# Altium PCB Mechalino_Second_Layer.PcbDoc
Units mm, origin at the board's own origin, x right, y up, seen from the top; angles counter-clockwise.
Board outline 120 x 120 mm, 2 copper layers (Top Layer, Bottom Layer), stack 1.5 mm thick; 32 components, 32 nets, 120 pads, 10 vias.
Unrouted connection lines stored in the file: 13.
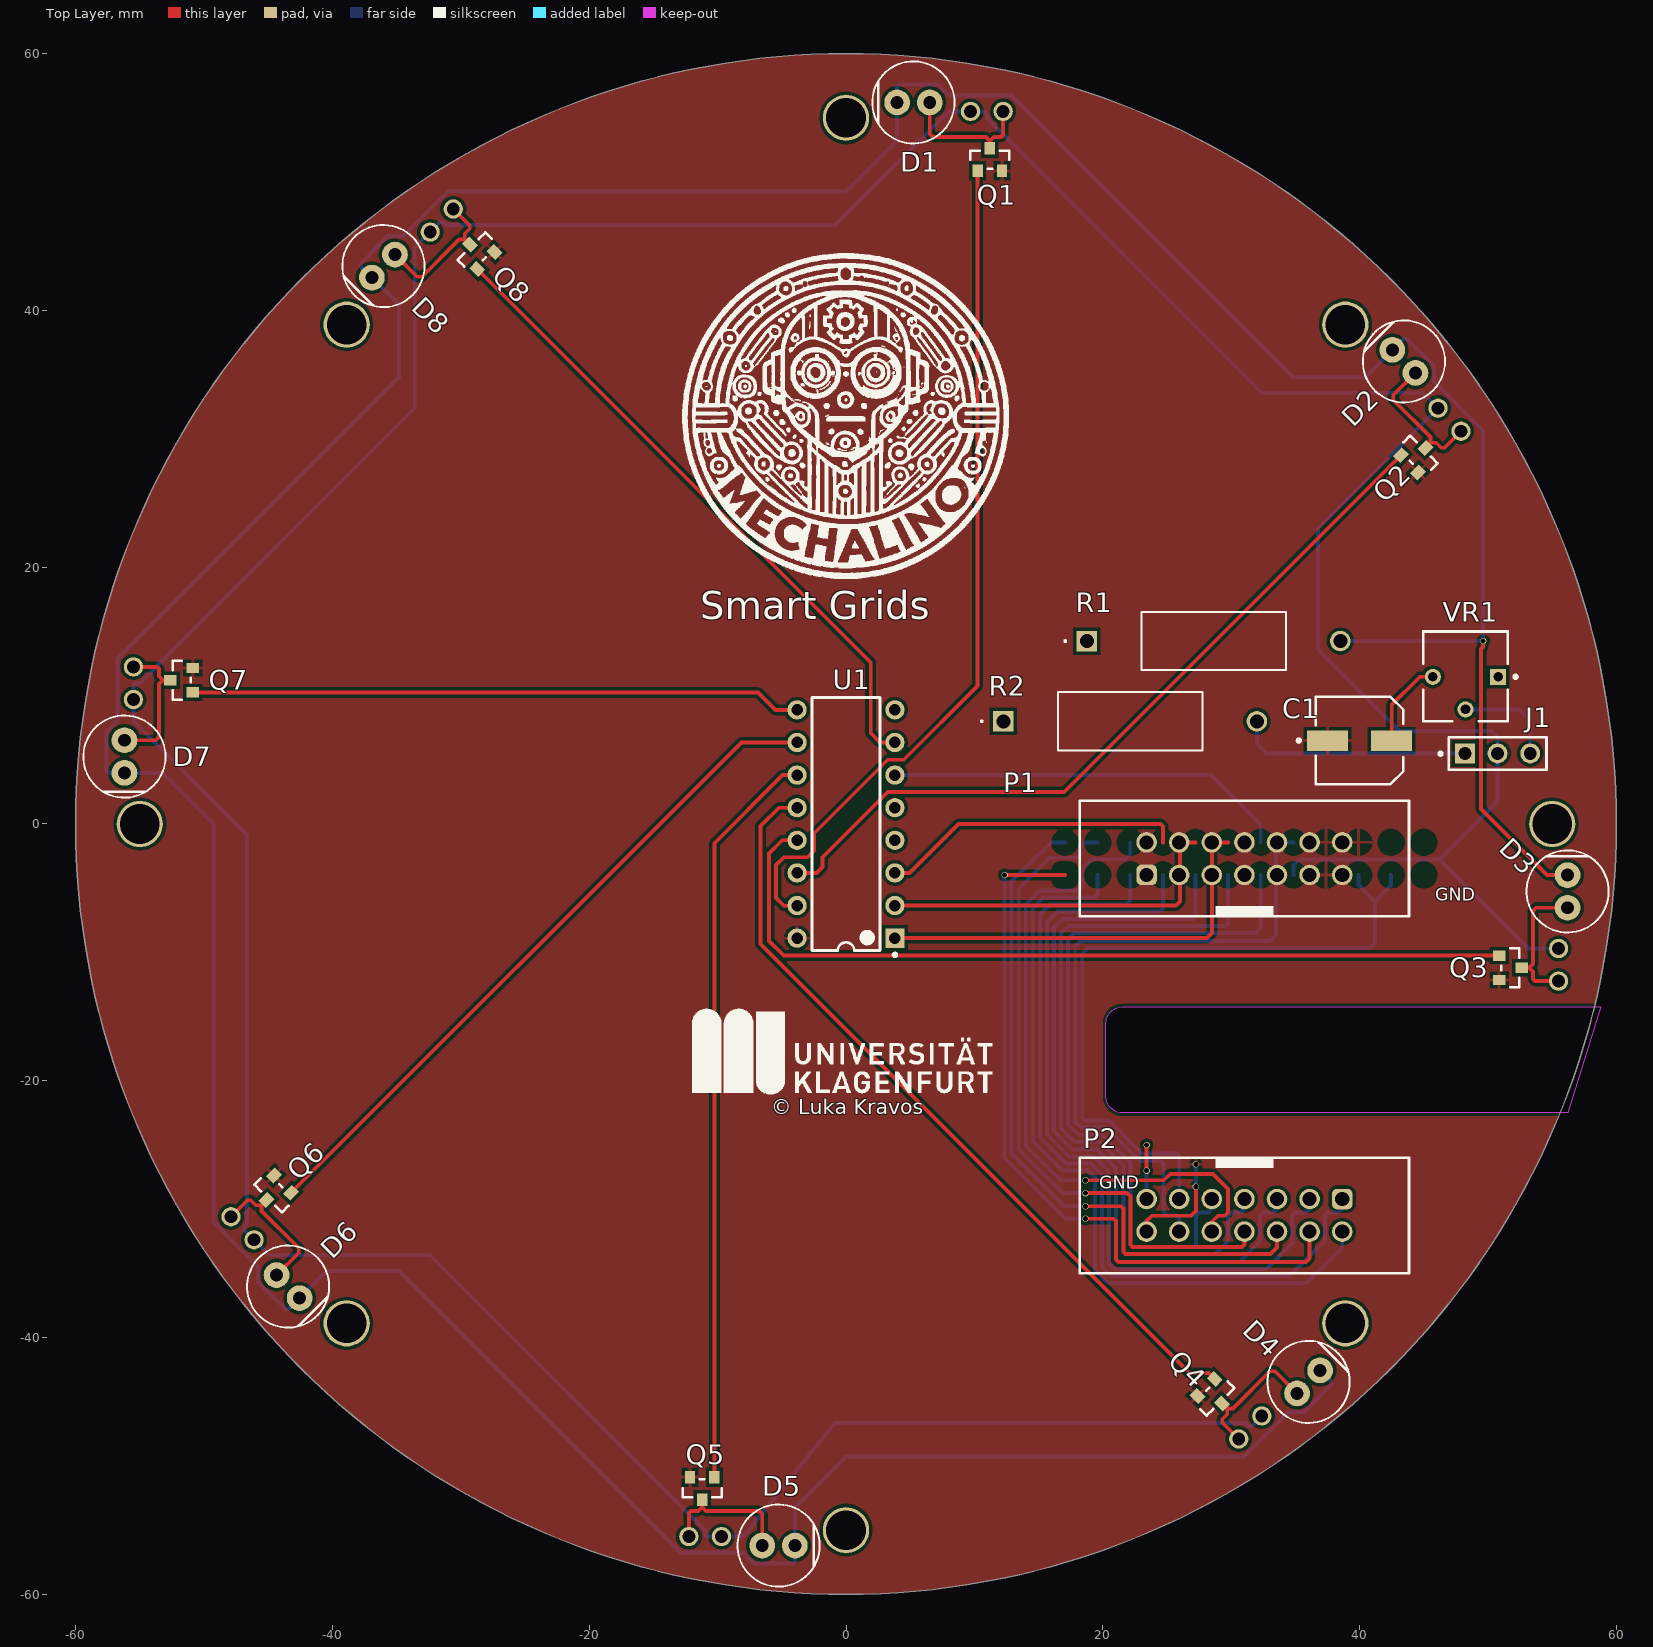
[diagram p0: Top Layer view]
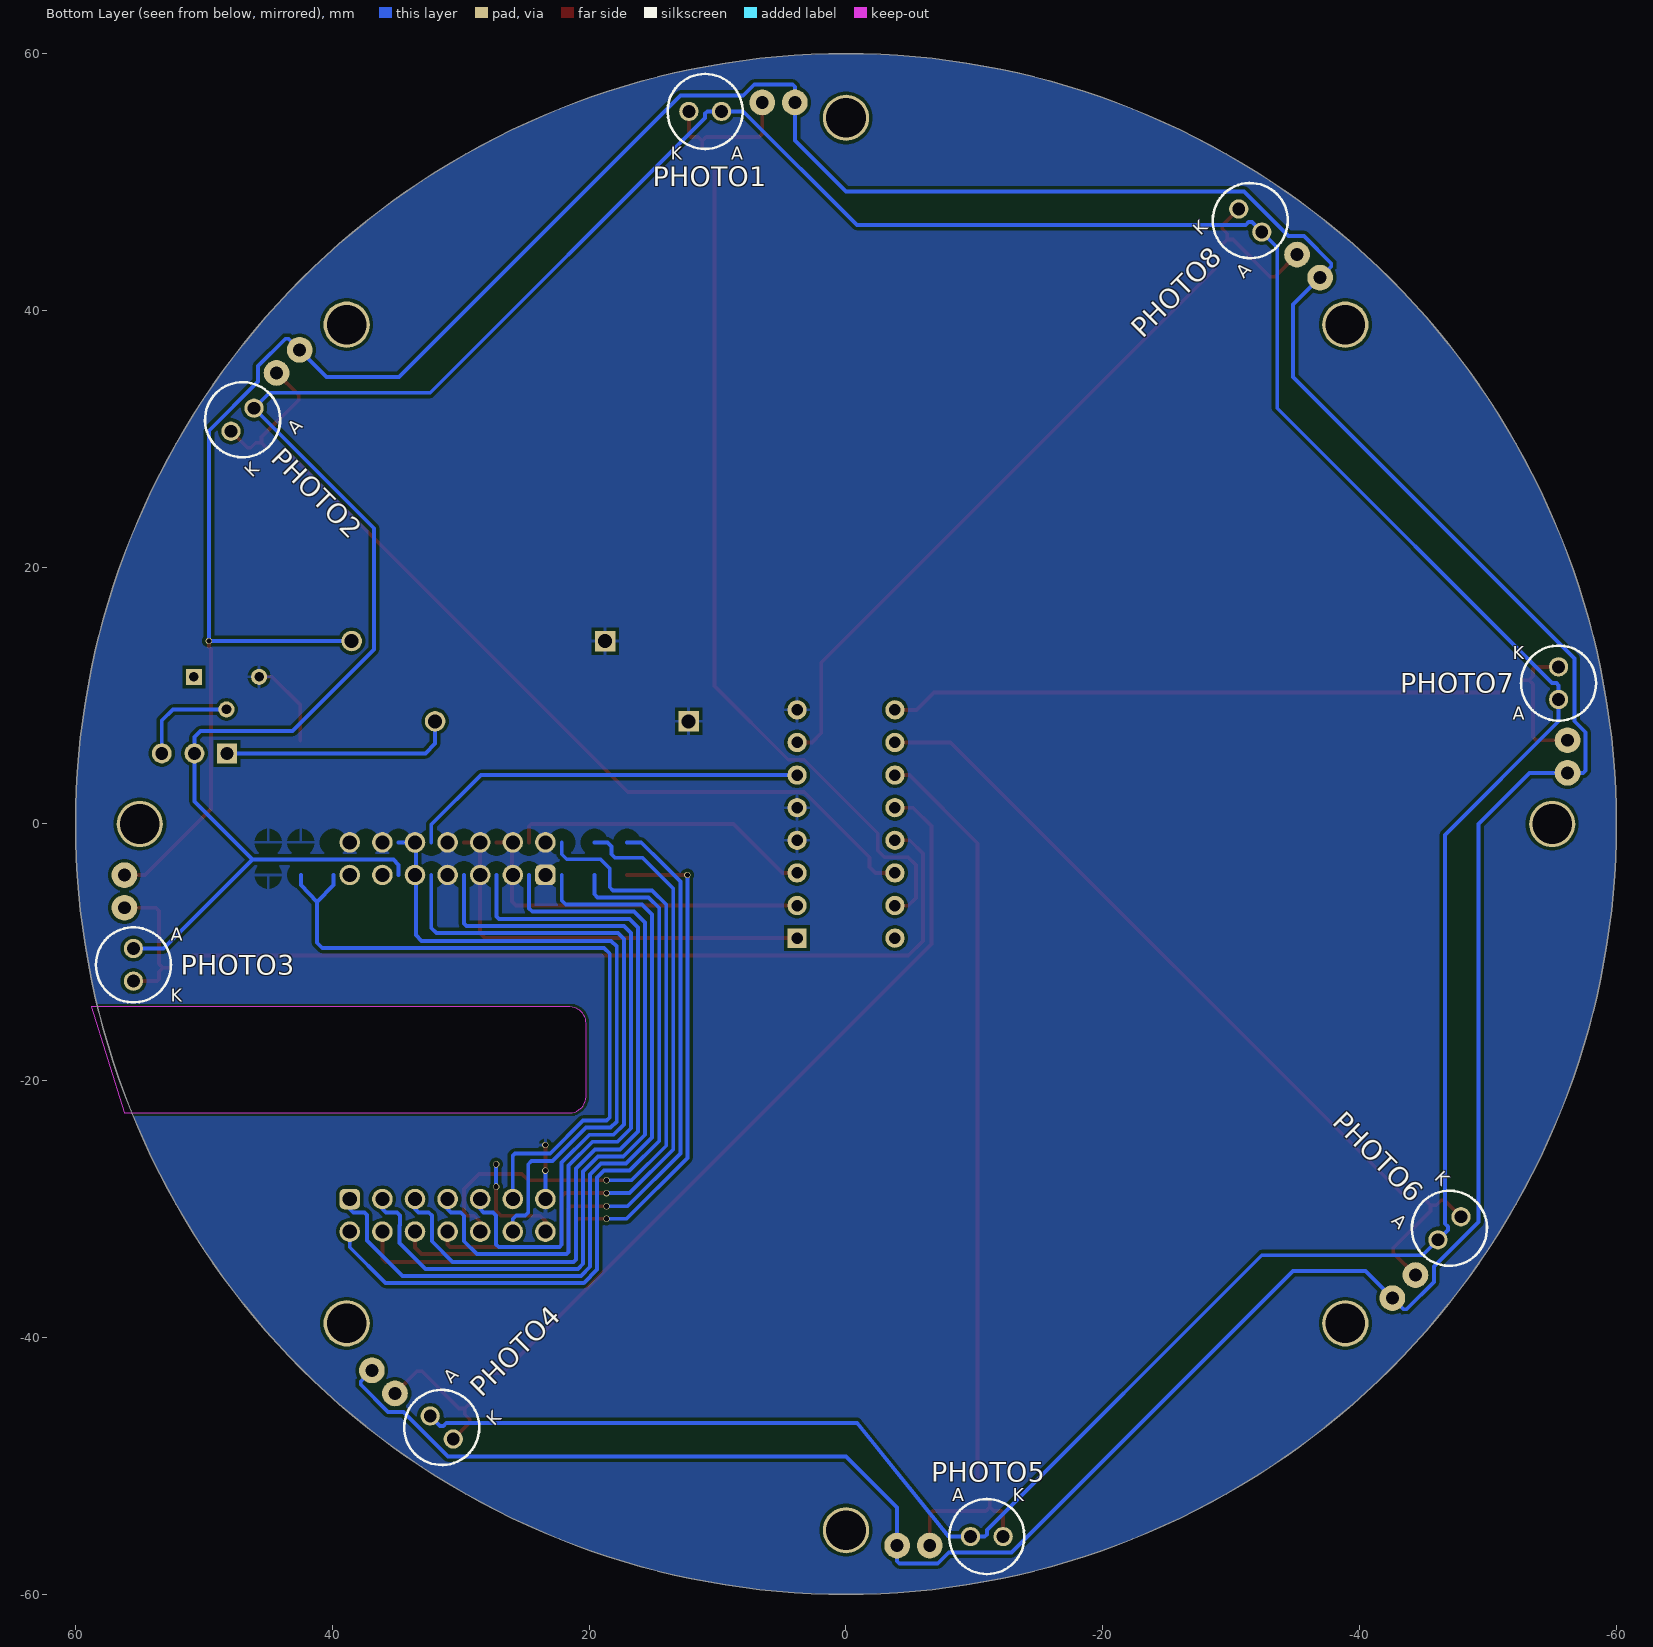
[diagram p1: Bottom Layer view, seen from below]
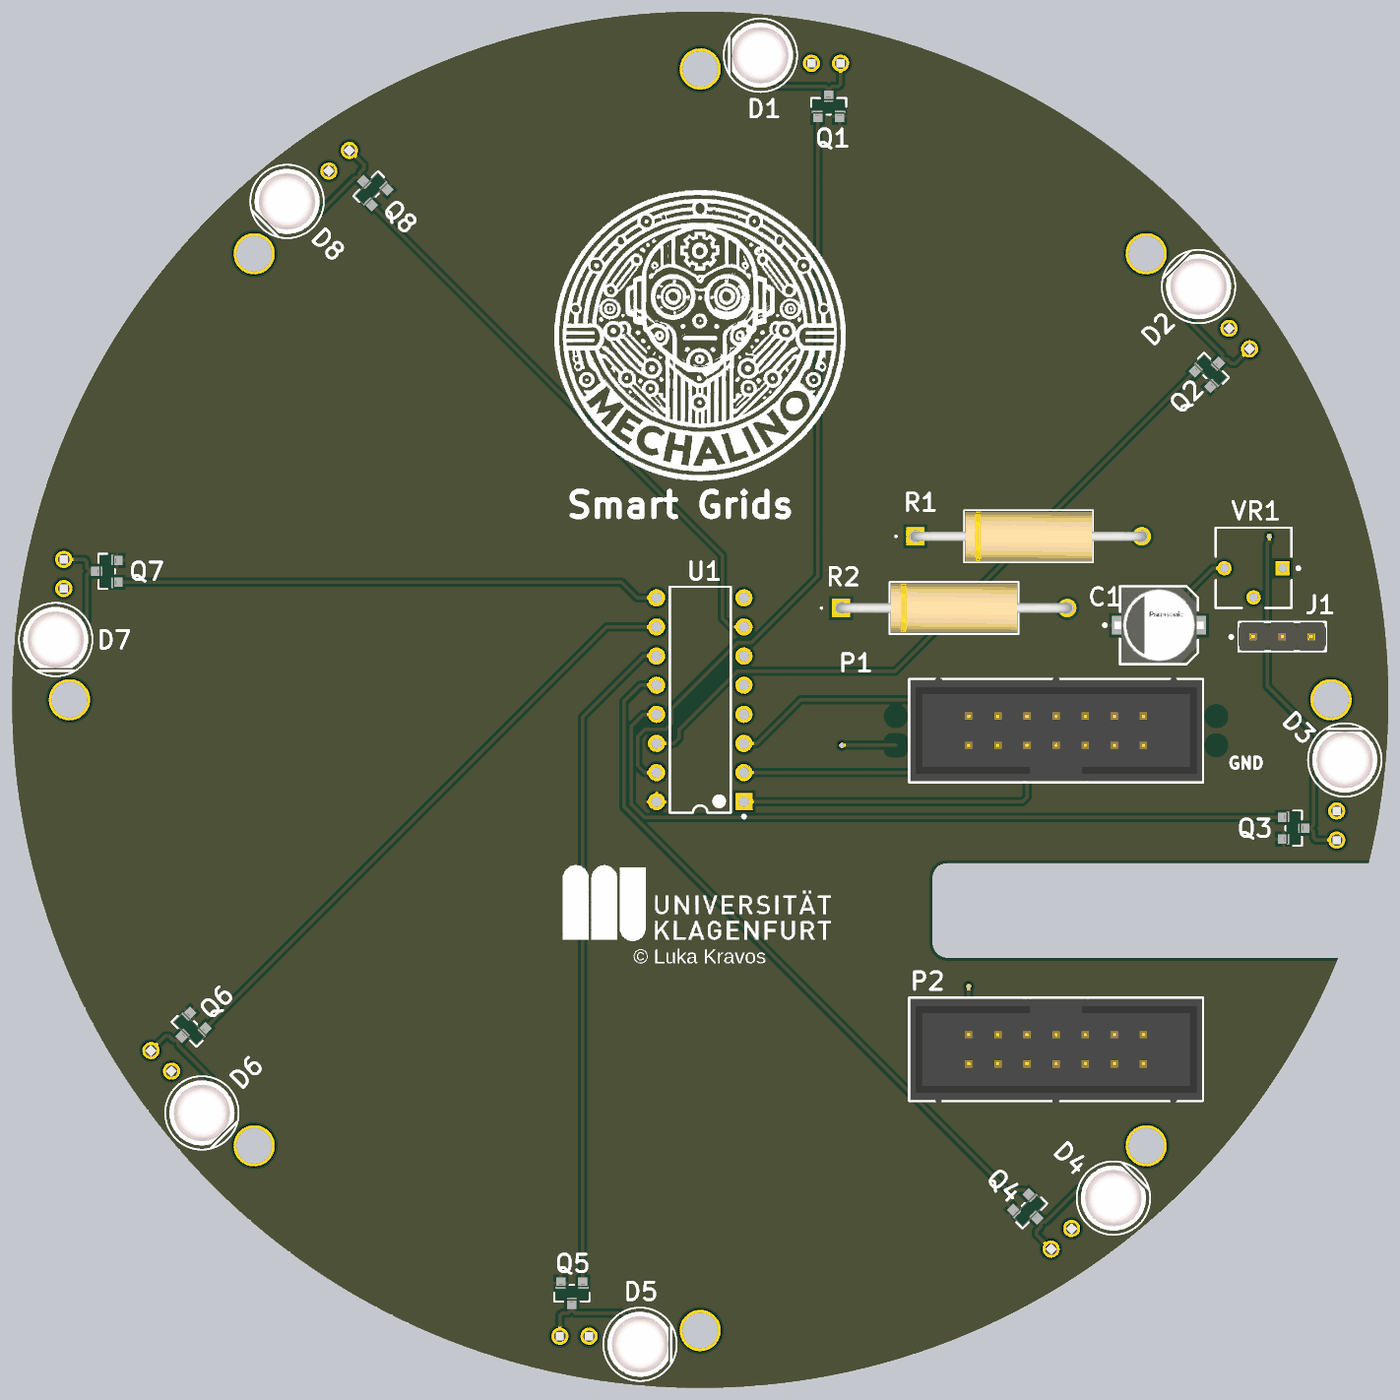
[diagram p2: 3D render of the assembled board from above, using the file's embedded part models]
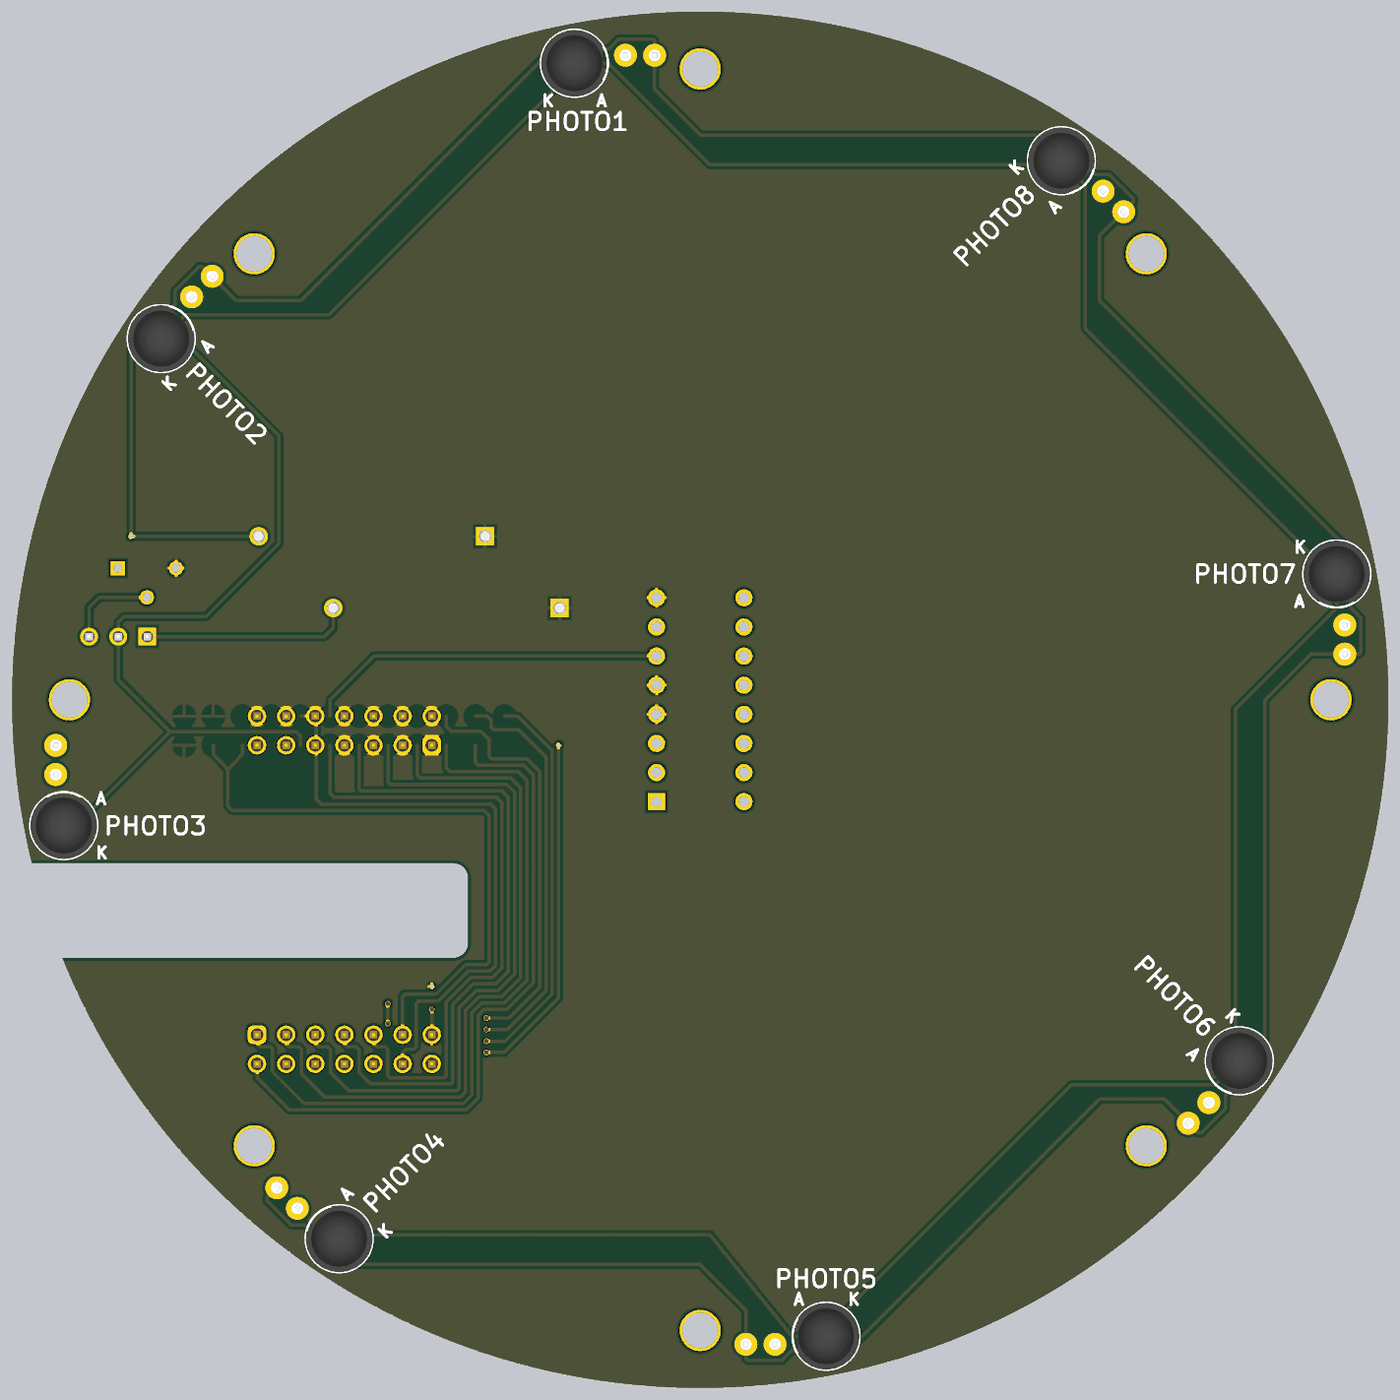
[diagram p3: 3D render of the assembled board from below, using the file's embedded part models]

## Layer stack, top to bottom
Top Solder: solder mask 0.05, SM-002, Dk 4
Top Layer: signal copper 0.1
Dielectric 1: dielectric 1.3, FR-4, Dk 4.8
Bottom Layer: signal copper 0.1
Bottom Solder: solder mask 0.05, SM-002, Dk 4

## Board outline
0,-60 cw(c0,0) -60,0 cw(c0,0) 0,60 cw(c0,0) 60,0 cw(c0,0)
cut-out: 20.598,-22.089 cw(c21.447,-21.239) 20.246,-21.239 20.246,-15.511 cw(c21.511,-15.511) 20.616,-14.616 cw(c21.5,-15.5) 21.5,-14.25 58.8,-14.25 56.2,-22.5 21.5,-22.5 cw(c21.5,-21.313) 20.661,-22.152

## Design rules (kind name [scope] priority, off if disabled: settings)
Clearance Clearance_1 [OnMid vs OnMid] p1: gap=0.25 ignorepadtopadclearanceinfootprint=FALSE sourcerule=42 cellrowname=All cellrowtype=0 cellcolname=All cellcoltype=0 innerlayers=TRUE
Clearance Clearance_2 [(ExistsOnLayer('Top Layer') Or ExistsOnLayer('Bottom Layer')) vs (ExistsOnLayer('Top Layer') Or ExistsOnLayer('Bottom Layer'))] p2: gap=0.25 ignorepadtopadclearanceinfootprint=FALSE sourcerule=42 cellrowname=All cellrowtype=0 cellcolname=All cellcoltype=0 outerlayers=TRUE
Clearance [All] p3: gap=0.254 ignorepadtopadclearanceinfootprint=FALSE ismatrix=TRUE
HoleSize [All] p1: absolutevalues=TRUE maxlimit=3.5 minlimit=0.025 maxpercent=80.000 minpercent=20.000
PolygonConnect [All] p1: connectstyle=Relief reliefconductorwidth=0.254 reliefentries=4 polygonreliefangle="90 Angle" airgapwidth=0.254
RoutingVias RoutingViaStyle_1 [All] p1: holewidth=0.4 width=0.5 viastyle="Through Hole" minholewidth=0.4 minwidth=0.5 maxholewidth=0.4 maxwidth=0.5
RoutingVias [All] p2: holewidth=0.711 width=1.27 viastyle="Through Hole" minholewidth=0.711 minwidth=1.27 maxholewidth=0.711 maxwidth=1.27
SilkToSolderMaskClearance [IsPad] p1: minsilkscreentomaskgap=0.2 clearancetoexposedcopper=TRUE
SolderMaskExpansion [All] p1: expansion=0.102 istentingtop=FALSE
SupplyNets "Schematic Supply Nets_4" [InNet('+3.3V')] p1: voltage=0.000
SupplyNets "Schematic Supply Nets_3" [InNet('BOOST+')] p2: voltage=0.000
SupplyNets "Schematic Supply Nets_2" [InNet('+3.3')] p3: voltage=0.000
SupplyNets "Schematic Supply Nets" [InNet('GND')] p4: voltage=0.000
Width MaxMinWidth_1 [All] p1: maxlimit=0.5 minlimit=0.254 preferedwidth=0.3 minimp=50.000000 maximp=50.000000 favimp=50.000000
Width [All] p2: maxlimit=0.254 minlimit=0.254 preferedwidth=0.254
28 further rules are at their usual default settings.

## Components (designator, comment, footprint, x,y, rotation, side; value= is the part's Value field where it differs from the comment)
C1 "47uF 25V" FP-FKD-MFG 40,6.5 r0 top
D1 "SFH 4550" FP-SFH_4550-MFG 5.25,56.2 r0 top
D2 "SFH 4550" FP-SFH_4550-MFG 43.452,36.027 r315 top
D3 "SFH 4550" FP-SFH_4550-MFG 56.2,-5.25 r270 top
D4 "SFH 4550" FP-SFH_4550-MFG 36.027,-43.452 r225 top
D5 "SFH 4550" FP-SFH_4550-MFG -5.25,-56.2 r180 top
D6 "SFH 4550" FP-SFH_4550-MFG -43.452,-36.027 r135 top
D7 "SFH 4550" FP-SFH_4550-MFG -56.2,5.25 r90 top
D8 "SFH 4550" FP-SFH_4550-MFG -36.027,43.452 r45 top
J1 "Jumper" FP-90120-0763-MFG 50.75,5.5 r0 top
P1 "61201421621" 61201421621 31.03,-2.7 r0 top
P2 "61201421621" 61201421621 31.03,-30.48 r180 top
PHOTO1 "SFH_203_FA" SFH203FA 9.7,55.5 r0 bottom
PHOTO2 "SFH_203_FA" SFH203FA 46.103,32.385 r315 bottom
PHOTO3 "SFH_203_FA" SFH203FA 55.5,-9.7 r270 bottom
PHOTO4 "SFH_203_FA" SFH203FA 32.385,-46.103 r225 bottom
PHOTO5 "SFH_203_FA" SFH203FA -9.7,-55.5 r180 bottom
PHOTO6 "SFH_203_FA" SFH203FA -46.103,-32.385 r135 bottom
PHOTO7 "SFH_203_FA" SFH203FA -55.5,9.7 r90 bottom
PHOTO8 "SFH_203_FA" SFH203FA -32.385,46.103 r45 bottom
Q1 "IRLML6402TRPbF" FP-Micro3-MFG 11.2,51.75 r90 top
Q2 "IRLML6402TRPbF" FP-Micro3-MFG 44.512,28.673 r45 top
Q3 "IRLML6402TRPbF" FP-Micro3-MFG 51.75,-11.2 r0 top
Q4 "IRLML6402TRPbF" FP-Micro3-MFG 28.673,-44.512 r315 top
Q5 "IRLML6402TRPbF" FP-Micro3-MFG -11.2,-51.75 r270 top
Q6 "IRLML6402TRPbF" FP-Micro3-MFG -44.512,-28.673 r225 top
Q7 "IRLML6402TRPbF" FP-Micro3-MFG -51.75,11.2 r180 top
Q8 "IRLML6402TRPbF" FP-Micro3-MFG -28.673,44.512 r135 top
R1 "10 Ohm" RES_AC01_VIS 18.764,14.25 r0 top
R2 "10k Ohm" RES_AC01_VIS 12.264,8 r0 top
U1 "SN74HC138N" N0016A 0,0 r180 top
VR1 "3362P-1-104LF" BOUR-3362P 48.25,11.5 r180 top

## Footprints (in the part's own frame and the unit in brackets; to place one, negate y for a bottom-side part, rotate by r counter-clockwise, add the part's x,y. Pads: shape width x height; smd on the part's side, far side on the other; paste and mask are expansions set on the pad)
61201421621 [mm] "14 pins, straight, gold plating"
  rrect50% 1.6x1.6 hole 1.1: 1(-7.62,-1.27)
  round 1.6 hole 1.1: 2(-7.62,1.27) 3(-5.08,-1.27) 4(-5.08,1.27) 5(-2.54,-1.27) 6(-2.54,1.27) 7(0,-1.27) 8(0,1.27) 9(2.54,-1.27) 10(2.54,1.27) 11(5.08,-1.27) 12(5.08,1.27) 13(7.62,-1.27) 14(7.62,1.27)
  silkscreen extent -12.82,-4.5 12.82,4.5, body extent -12.72,-4.42 12.72,4.75, height 9.13
BOUR-3362P [mm] "THD, 3-Leads, Body 6.6x6.99mm, Pitch 2.54mm"
  rect 1.25x1.25 hole 0.75: 1(-2.54,0.035)
  round 1.25 hole 0.75: 2(0,2.575) 3(2.54,0.035)
  silkscreen extent -4.03,-3.49 3.3,3.49, body extent -3.3,-3.49 3.3,3.49, height 4.95
FP-90120-0763-MFG [mm]
  rect 1.55x1.55 hole 1 paste-2539.97 mask+0: 1(-2.54,0)
  round 1.55 hole 1 paste-2539.97 mask+0: 2(0,0) 3(2.54,0)
  silkscreen extent -4.57,-1.27 3.81,1.27, body extent -3.91,-1.37 3.91,1.37, height 0.25
FP-FKD-MFG [mm]
  rect 3.2x1.6 smd paste+0 mask+0: 1(-2.5,0) 2(2.5,0)
  silkscreen extent -4.85,-3.4 3.4,3.4, body extent -4.35,-3.65 4.35,3.65, height 0.25
FP-Micro3-MFG [mm]
  rect 0.972x0.802 smd paste+0 mask+0: 1(-0.885,0.95) 2(-0.885,-0.95) 3(0.885,0)
  silkscreen extent -0.7,-1.52 0.7,1.52, body extent -1.47,-1.87 1.47,1.87, height 0.25
FP-SFH_4550-MFG [mm]
  round 2 hole 1 paste-2539.97 mask+0: 1(-1.27,0) 2(1.27,0)
  silkscreen extent -3.2,-3.2 3.2,3.2, body extent -3.05,-3.05 3.05,3.05, height 0.25
N0016A [mm] "DIP, 16-Leads, Body 19.7x6.6mm, Pitch 2.54mm"
  rect 1.5x1.5 hole 0.9: 1(-3.81,8.89)
  round 1.5 hole 0.9: 2(-3.81,6.35) 3(-3.81,3.81) 4(-3.81,1.27) 5(-3.81,-1.27) 6(-3.81,-3.81) 7(-3.81,-6.35) 8(-3.81,-8.89) 9(3.81,-8.89) 10(3.81,-6.35) 11(3.81,-3.81) 12(3.81,-1.27) 13(3.81,1.27) 14(3.81,3.81) 15(3.81,6.35) 16(3.81,8.89)
  silkscreen extent -3.94,-9.85 2.65,10.31, body extent -3.95,-9.85 3.95,9.85, height 5.08
RES_AC01_VIS [mil]
  rect 63x63 / inner round 60 / far side rect 63x63 hole 43 paste-99999 mask+0: 1(0,0)
  round 63 / inner round 60 / far side round 63 hole 43 paste-99999 mask+0: 2(777,0)
  silkscreen extent -69,-90 610,90, body extent -16,-84 794,84, height 169
SFH203FA [mm]
  round 1.5 hole 1: 1(0,0) 2(2.54,0)
  silkscreen extent -1.65,-2.93 4.19,2.93, body extent -1.18,-2.91 4.18,2.91, height 12.5

## Part data
C1: library part CMP-05427-000093-1, "CAP ALUM 47UF 20% 25V SMD", Capacitance=47uF, Case/Package=Radial, Dielectric Material=Aluminium, ESR (Equivalent Series Resistance)=360mR, Leakage Current=3uA, Max Operating Temperature=105°C, Min Operating Temperature=-55°C, Package Quantity=1000, Ripple Current=240mA, Tolerance=20%, Voltage=25V, Construction=Cylindrical, Contact Plating=Tin, Diameter=6.3mm, Height=5.8mm, Height - Seated (Max)=0.24inch, Impedance=360mR, Lead Free="Lead Free", Length=5.8mm, Life (Hours)=2000Hour, Mount="Surface Mount", Number of Pins=2, Packaging="Tape and Reel", Polarity=Polar, Radiation Hardening=No, REACH SVHC="No SVHC", Ripple Current (AC)=240mA, RoHS Compliant=Yes, Series=FK, Termination=SMD/SMT, Voltage Rating=25V, Voltage Rating (DC)=25V, Width=7.8mm
D1 D2 D3 D4 D5 D6 D7 D8: library part CMP-62016-000011-1, "EMITTER IR 860NM 100MA RADIAL", Colour=Infrared, Forward Current=100mA, Forward Voltage=1.5V, Manufacturer="Osram Opto", Reverse Voltage=5V, Temperature="-40°C to +100°C", Temperature Range High=+100°C, Temperature Range Low=-40°C, Automotive=No, Category=Diode, ComponentLink2Description=Datasheet, ComponentLink2URL=https://dammedia.osram.info/media/resource/hires/osram-dam-5580407/SFH%204550_EN.pdf, Device Class L1=Optoelectronics, Device Class L2=LEDs, Device Class L3=unset, Digikey Description="EMITTER IR 860NM 100MA RADIAL", Lead Free=Yes, Led Orientation=Straight, Manufacturer Part Number="SFH 4550", Mouser Description="Infrared Emitters - High Power Infrared 850 nm HALF ANGLE +/-3DEG", Octopart=https://octopart.com/sfh+4550-osram+opto-55410894, Package="SFH 4550", Peak Emmision Wavelength=860nm, RoHS=TRUE, Viewing Angle=6°
J1: library part CMP-04776-000084-1, "CONN HEADER VERT 3POS 2.54MM", Current Rating=3A, Manufacturer=Molex, Manufacturer Part Number=90120-0763, Temperature="-55°C to +125°C", Temperature Range High=+125°C, Temperature Range Low=-55°C, Voltage Rating=350V, Automotive=No, Category=Conn, ComponentLink2Description=Datasheet, ComponentLink2URL=https://www.molex.com/webdocs/datasheets/pdf/en-us/0901200763_PCB_HEADERS.pdf, Conn Gender=Male, Conn Orientation=Vertical, Contact Material=Gold,Nickel, Device Class L1=Connectors, Device Class L2="Headers and Wire Housings", Device Class L3=unset, Digikey Description="CONN HEADER VERT 3POS 2.54MM", Footprint Url=https://www.molex.com/pdm_docs/sd/901200763_sd.pdf, Height=5.8mm, Lead Free=Yes, Mouser Description="Board-To-Board Connector, C-Grid III 90120 Series, Through Hole, Header, 3, 2.54 mm", Number of Contacts=3, Number of Rows=1, Octopart=https://octopart.com/90120-0763-molex-655433, Package=90120-0763, Pitch=2.54mm, RoHS=TRUE
P1 P2: library part CMP-1502-00008-2, Color=Black, Contact Resistance=20mΩ, Current Rating=3A, Insulation Resistance=1GΩ, Max Operating Temperature=105°C, Min Operating Temperature=-40°C, Operating Supply Voltage=250V, Connector Type="Male Pin", Contact Material=Copper, Contact Plating=Gold, Gender=Male, Height=9.25mm, Insulation Material=PBT, Lead Pitch=2.54mm, Length=25.44mm, Mount="Through Hole", NexarPartId=26603596, Number of Contacts=14, Number of Pins=14, Number of Positions=14, Number of Rows=2, Orientation=Vertical, Pitch=2.54mm, REACH SVHC=Unknown, RoHS=Compliant, Row Spacing=2.54mm, Termination=Solder, Voltage Rating=250V
PHOTO1 PHOTO2 PHOTO3 PHOTO4 PHOTO5 PHOTO6 PHOTO7 PHOTO8: "PHOTO", Manufacturer_Name="ams OSRAM", Manufacturer_Part_Number="SFH 203 FA", Mouser Part Number=720-SFH203FA, Datasheet Link=https://datasheet.datasheetarchive.com/originals/distributors/DKDS41/DSANUWW0036828.pdf, Height=8.9mm, Mouser Price/Stock=https://www.mouser.co.uk/ProductDetail/OSRAM-Opto-Semiconductors/SFH-203-FA?qs=K5ta8V%252BWhtaq1pinUuBcnA%3D%3D
Q1 Q2 Q3 Q4 Q5 Q6 Q7 Q8: library part CMP-32901-000130-1, "MOSFET P-CH 20V 3.7A SOT-23", Continuous Drain Current=-3.7A, Drain To Source Breakdown Voltage=-20V, Drain To Source Resistance=0.05Ω, Gate To Source Voltage=12V, Input Capacitace At Vds="633pF @ -10V", Manufacturer=Infineon, Manufacturer Part Number=IRLML6402TRPBF, Max Forward Diode Voltage=-1.2V, Max Junction Temp=+150°C, Package=Micro3, Power Dissipation=1.3W, Pulse Drain Current=-22A, Temperature="-55°C to +150°C", Temperature Range Low=-55°C, Automotive=No, Category=Trans, ComponentLink2Description=Datasheet, ComponentLink2URL=https://www.infineon.com/dgdl/irlml6402pbf.pdf?fileId=5546d462533600a401535668d5c2263c, Depletion Mode=False, Device Class L1="Discrete Semiconductors", Device Class L2=Transistors, Device Class L3=MOSFETs, Digikey Description="MOSFET P-CH 20V 3.7A SOT-23", Drain To Source Voltage=-20V, Footprint Url=http://irf.com/package/outline/po_micro3.pdf, Gate Charge At Vgs="8nC @ -5V", Height=1.12mm, Ipc Land Pattern Name=SOT95P237X100-3, Lead Free=Yes, Number Of Channels=1, Number Of P Channels=1, Octopart=https://octopart.com/irlml6402trpbf-infineon-65874989, Reverse Recovery Charge=11nC, Reverse Recovery Time=29ns, RoHS=TRUE, Rthja Max=75°C/W, Standoff Height=0.01mm, Technology=MOSFET, Temperature Range High=+150°C, Threshold Vgs=-0.55V, Threshold Vgs Max=-1.2V, Threshold Vgs Min=-0.4V, Turn Off Delay Time=588ns, Turn On Delay Time=350ns
R1 R2: library part CMP-00030-39747193-1, "AC01000004309JA100 Res Wirewound 10 Ohm 5% 1W 100ppm/°C to 180ppm/°C Conformal AXL Thru-Hole Ammo Pack", Case/Package=Axial, Max Operating Temperature=275°C, Max Power Dissipation=1W, Min Operating Temperature=0°C, Resistance=43Ω, Temperature Coefficient=180ppm/°C, Tolerance=5%, Voltage Rating (DC)=7V, Composition=Wirewound, Contact Plating=Tin, Diameter=4.3mm, Features="Flame Retardant Coating", Lead Diameter=800µm, Length=11mm, Mount="Through Hole", NexarPartId=39747193, Number of Terminations=2, Packaging="Tape & Box (TB)", Power Rating=1W, RoHS=Compliant, Termination=Axial, Weight=519.986953mg
U1: library part CMP-1633-00627-2, "3-Line To 8-Line Decoders/Demultiplexers, N0016A, TUBE", F @ Nom Voltage(Max)(Mhz)=28, Generic Part Number=SN74HC138, ICC @ Nom Voltage(Max)(mA)=0.08, Manufacturer="Texas Instruments", Operating Temperature Range(C)="-40 to 85", Rating=Catalog, tpd @ Nom Voltage(Max)(ns)=45, Voltage(Nom)(V)=3.3,5, Bits(#)=8, Channels(#)=1, Code_JEDEC=MS-001, Configuration=3：8, DatasheetVersion=SCLS107E, Function=Decoder/Demultiplexer, Input Type=LVTTL/CMOS, Output Drive (IOL/IOH)(Max)(mA)=5.2/-5.2, Output Type=CMOS, PackageReference=N0016A, Schmitt Trigger=No, Technology Family=HC, Type=Standard, VCC(Max)(V)=6, VCC(Min)(V)=2
VR1: library part CMP-1747-00003-1, "Square Trimpot(R) Trimming Potentiometer, 100 KOhm, 300 V, -55 to 125 degC, 3-Pin THD, RoHS, Tube", Case\Package=Axial, Max Operating Temperature="155 degC", Min Operating Temperature="-55 degC", Package Quantity=200, Power Rating="250 mW", Resistance="1 mohm", Tolerance=1%, Voltage Rating="250 V", ComponentLink1Description="Manufacturer URL", ComponentLink1URL=http://www.bourns.com/, ComponentLink2Description=Datasheet, ComponentLink2URL=http://www.bourns.com/docs/Product-Datasheets/3362.pdf, DatasheetVersion=May-16, Length="0.248 inch", Mount="Through Hole", PackageDescription="3-Pin Through Hole Device, Body 6.6 x 6.99 mm, Pitch 2.54 mm", PackageReference=3326P, Packaging=Bulk, RoHSCompliant=true

## Free pads (board coordinates)
  round 3.6 hole 3.1: 12(0,55) 13(38.891,38.891) 14(55,0) 15(38.891,-38.891) 16(0,-55) 17(-38.891,-38.891) 18(-38.891,38.891) 19(-55,0)

## Via types
v1: diameter 0.5, hole 0.4, Top Layer to Bottom Layer, 10 vias

## Nets (pads, with @x,y where several pads share a name; then routed paths per layer and width w, separated by ;. In a path a pad name is that pad's centre, name@x,y a point inside that pad or via, vN(x,y) a via of type N, cw(c..) or ccw(c..) an arc to the next point about the centre after c; other vN are vias at no path point)
+3.3: C1.1 Q1.2 Q2.2 Q3.2 Q4.2 Q5.2 Q6.2 Q7.2 Q8.2 U1.16
+3.3V: P1.6 P2.11 | length 56.5
  Bottom Layer w0.3: P2.11 25.95,-25.828 25.774,-25.652 23.033,-25.652 20.481,-23.1 18.651,-23.1 18.4,-22.849 18.4,-10.1 18.85,-9.65 40.79,-9.65 41.19,-9.25 41.19,-6.08 ; 39.92,-3.97 39.92,-4.75 41.19,-6.08 ; 42.46,-3.97 42.46,-4.75 41.19,-6.08
A2: P1.9 P2.1 | length 121.2
  Bottom Layer w0.3: 22.14,-3.97 22.14,-5.96 21.83,-6.27 15.88,-6.27 15.1,-7.05 15.1,-24.428 17.122,-26.45 19.089,-26.45 19.93,-27.291 19.93,-34.482 20.648,-35.2 34.55,-35.2 37.31,-32.44 37.31,-30.44 37.5,-30.25 38.38,-30.25 38.65,-29.98 P2.1 ; 29.76,-3.97 29.75,-3.98 29.75,-5.5 29.75,-7.75 29.55,-7.95 17.3,-7.95 16.75,-8.5 16.75,-23.7 17.8,-24.75 19.752,-24.75 21.6,-26.598 21.6,-33.322 21.778,-33.5 28.75,-33.5 29.75,-32.5 29.75,-30.508 30.008,-30.25 30.76,-30.25 31.03,-29.98 31.03,-29.21
A3: P1.3 P2.3 | length 121.5
  Bottom Layer w0.3: 24.68,-3.97 24.68,-6.574 24.434,-6.82 16.505,-6.82 15.65,-7.675 15.65,-24.2 17.35,-25.9 19.317,-25.9 20.48,-27.063 20.48,-34.254 20.876,-34.65 32.75,-34.65 34.77,-32.63 34.77,-31.253 34.75,-31.233 34.75,-30.48 34.98,-30.25 35.84,-30.25 36.11,-29.98 P2.3 ; 27.22,-3.97 27.22,-7.2 27.02,-7.4 16.85,-7.4 16.2,-8.05 16.2,-23.955 17.595,-25.35 19.545,-25.35 21.03,-26.835 21.03,-33.924 21.206,-34.1 30.65,-34.1 32.25,-32.5 32.25,-30.5 32.5,-30.25 33.3,-30.25 33.57,-29.98 33.57,-29.21
B0: J1.2 P1.2 PHOTO1.1 PHOTO2.1 PHOTO3.1 PHOTO4.1 PHOTO5.1 PHOTO6.1 PHOTO7.1 PHOTO8.1 | length 353
  Bottom Layer w0.3: PHOTO4.1 31.612,-46.877 31.363,-46.877 31.134,-46.648 -0.849,-46.648 -8.003,-55.5 PHOTO5.1 -10.794,-55.5 -10.97,-55.324 -10.97,-55 -32.385,-33.585 -44.903,-33.585 PHOTO6.1 -46.877,-31.612 -46.877,-31.363 -46.648,-31.134 -46.648,-0.849 -55.5,8.003 PHOTO7.1 -55.5,10.794 -55.324,10.97 -55,10.97 -33.585,32.385 -33.585,44.903 PHOTO8.1 -31.612,46.877 -31.363,46.877 -31.134,46.648 -0.849,46.648 8.003,55.5 PHOTO1.1 10.794,55.5 10.97,55.324 10.97,55 32.385,33.585 44.903,33.585 PHOTO2.1 36.75,23.032 36.75,13.598 43.098,7.25 50.27,7.25 50.75,6.77 J1.2 50.75,1.756 46.224,-2.77 ; 34.84,-3.97 34.84,-3.18 35.25,-2.77 46.224,-2.77 ; PHOTO3.1 53.154,-9.7 46.224,-2.77
B1: P1.7 U1.6 | length 31.5
  Bottom Layer w0.3: U1.6 28.44,3.81 32.3,-0.05 32.3,-1.43
B3: P1.1 U1.1 | length 33
  Top Layer w0.3: U1.1 28.11,-8.89 28.5,-8.5 28.5,-1.71 28.78,-1.43 29.76,-1.43
B4: P1.11 U1.2 | length 28
  Top Layer w0.3: U1.2 25.7,-6.35 26,-6.05 26,-1.68 26.25,-1.43 27.22,-1.43
B5: P1.13 U1.3 | length 23.8
  Top Layer w0.3: U1.3 4.94,-3.81 8.75,0 24.504,0 24.68,-0.176 24.68,-1.43
B7: P1.5 P2.5
B8: P1.4 P2.7
BOOST+: P1.10 P2.9 | length 56.2
  Bottom Layer w0.3: P2.9 28.49,-29.98 28.22,-30.25 27.48,-30.25 27.25,-30.48 27.25,-32.75 27.05,-32.95 22.326,-32.95 22.15,-32.774 22.15,-26.37 19.98,-24.2 18.095,-24.2 17.3,-23.405 17.3,-8.95 17.75,-8.5 31.9,-8.5 32.3,-8.1 32.3,-3.97
GND: C1.2 P1.14 P2.13 R1.1 R2.1 U1.4 U1.5 U1.8 VR1.3 | length 11.1
  Top Layer w0.3: v1(23.41,-27) v1(23.41,-25) ; C1.2 42.5,9.267 44.698,11.465 VR1.3
  Bottom Layer w0.3: P2.13 v1(23.41,-27)
NetD1_1: D1.1 D2.1 D3.1 D4.1 D5.1 D6.1 D7.1 D8.1 R1.2 | length 361.7
  Top Layer w0.3: v1(49.624,14.25) 49.624,13.798 49.452,13.626 49.452,1.165 54.598,-3.98 D3.1
  Bottom Layer w0.3: D4.1@36.925,-42.554 37.791,-43.419 37.791,-43.668 35.674,-45.785 34.471,-45.785 31.006,-49.25 0,-49.25 -3.98,-53.23 D5.1 -3.98,-57.424 -4.156,-57.6 -7.15,-57.6 -8,-56.75 -12.9,-56.75 -34.825,-34.825 -40.454,-34.825 D6.1 -43.419,-37.791 -43.668,-37.791 -45.785,-35.674 -45.785,-34.471 -49.25,-31.006 -49.25,0 -53.23,3.98 D7.1 -57.424,3.98 -57.6,4.156 -57.6,7.15 -56.75,8 -56.75,12.9 -34.825,34.825 -34.825,40.454 D8.1 -37.791,43.419 -37.791,43.668 -35.674,45.785 -34.471,45.785 -31.006,49.25 0,49.25 3.98,53.23 D1.1 3.98,57.424 4.156,57.6 7.15,57.6 8,56.75 12.9,56.75 34.825,34.825 40.454,34.825 D2.1 ; R1.2 v1(49.624,14.25) 49.624,30.632 45.785,34.471 45.785,35.674 43.668,37.791 43.419,37.791 D2.1
NetD1_2: D1.2 PHOTO1.2 Q1.3 | length 11
  Top Layer w0.3: D1.2 6.52,53.75 6.77,53.5 10.89,53.5 11.2,53.19 ; Q1.3 11.2,53.19 ; PHOTO1.2 12.24,53.676 12.064,53.5 11.51,53.5 11.2,53.19
NetD2_2: D2.2 PHOTO2.2 Q2.3 | length 11
  Top Layer w0.3: D2.2 42.617,33.397 42.617,33.043 45.531,30.13 45.531,29.691 ; Q2.3 45.531,29.691 ; PHOTO2.2 46.61,29.3 46.361,29.3 45.969,29.691 45.531,29.691
NetD3_2: D3.2 PHOTO3.2 Q3.3 | length 11
  Top Layer w0.3: Q3.3 53.19,-11.2 ; PHOTO3.2 53.676,-12.24 53.5,-12.064 53.5,-11.51 53.19,-11.2 ; D3.2 53.75,-6.52 53.5,-6.77 53.5,-10.89 53.19,-11.2
NetD4_2: D4.2 PHOTO4.2 Q4.3 | length 11
  Top Layer w0.3: Q4.3 29.691,-45.531 ; PHOTO4.2 29.3,-46.61 29.3,-46.361 29.691,-45.969 29.691,-45.531 ; D4.2 33.397,-42.617 33.043,-42.617 30.13,-45.531 29.691,-45.531
NetD5_2: D5.2 PHOTO5.2 Q5.3 | length 11
  Top Layer w0.3: PHOTO5.2 -12.24,-53.676 -12.064,-53.5 -11.51,-53.5 -11.2,-53.19 ; Q5.3 -11.2,-53.19 ; D5.2 -6.52,-53.75 -6.77,-53.5 -10.89,-53.5 -11.2,-53.19
NetD6_2: D6.2 PHOTO6.2 Q6.3 | length 11
  Top Layer w0.3: PHOTO6.2 -46.61,-29.3 -46.361,-29.3 -45.969,-29.691 -45.531,-29.691 ; Q6.3 -45.531,-29.691 ; D6.2 -42.617,-33.397 -42.617,-33.043 -45.531,-30.13 -45.531,-29.691
NetD7_2: D7.2 PHOTO7.2 Q7.3 | length 11
  Top Layer w0.3: D7.2 -53.75,6.52 -53.5,6.77 -53.5,10.89 -53.19,11.2 ; PHOTO7.2 -53.676,12.24 -53.5,12.064 -53.5,11.51 -53.19,11.2 ; Q7.3 -53.19,11.2
NetD8_2: D8.2 PHOTO8.2 Q8.3 | length 11
  Top Layer w0.3: D8.2@-35.396,43.978 D8.2@-35.396,43.98 ; D8.2 -33.397,42.617 -33.043,42.617 -30.13,45.531 -29.691,45.531 ; PHOTO8.2 -29.3,46.61 -29.3,46.361 -29.691,45.969 -29.691,45.531 ; Q8.3 -29.691,45.531
NetJ1_1: J1.1 R2.2 | length 18.3
  Bottom Layer w0.3: R2.2 32,6.259 32.759,5.5 J1.1
NetJ1_3: J1.3 VR1.2 | length 8
  Bottom Layer w0.3: VR1.2 52.415,8.925 53.29,8.05 J1.3
Y0: Q1.1 U1.15 | length 66.8
  Top Layer w0.3: U1.15 -3.831,-6.371 -4.834,-6.371 -5.45,-5.755 -5.45,-3.2 -4.838,-2.588 -3,-2.588 -2.473,-2.061 -2.473,-0.723 3.25,5 4.5,5 10.25,10.75 Q1.1
Y1: Q2.1 U1.14 | length 60.9
  Top Layer w0.3: U1.14 -2.31,-3.81 -1.838,-3.338 -1.838,-2.588 3.25,2.5 16.996,2.5 Q2.1
Y2: Q3.1 U1.13 | length 66.8
  Top Layer w0.3: U1.13 -4.97,-1.27 -6,-2.3 -6,-9.1 -4.85,-10.25 Q3.1
Y3: Q4.1 U1.12 | length 62
  Top Layer w0.3: U1.12 -5.23,1.27 -6.65,-0.15 -6.65,-9.35 26.75,-42.75 28.254,-42.75 Q4.1
Y4: Q5.1 U1.11 | length 58
  Top Layer w0.3: Q5.1 -10.25,-1.5 -4.94,3.81 U1.11
Y5: Q6.1 U1.10 | length 53.9
  Top Layer w0.3: Q6.1 -8.145,6.35 U1.10
Y6: Q7.1 U1.9 | length 47.7
  Top Layer w0.3: Q7.1 -6.86,10.25 -5.5,8.89 U1.9 U1.9@-3.855,8.845
Y7: Q8.1 U1.7 | length 51
  Top Layer w0.3: Q8.1@-28.717,43.217 1.924,12.576 1.924,7.076 2.65,6.35 U1.7
pads on no net: P1.8 P1.12 P2.2 P2.4 P2.6 P2.8 P2.10 P2.12 P2.14 VR1.1
copper on no net: | length 337.5
  Top Layer w0.3: v1(12.35,-3.97) 17.06,-3.97 ; v1(18.651,-30.75) 20.854,-30.75 21.03,-30.926 21.03,-33.924 21.206,-34.1 35.84,-34.1 36.11,-33.83 36.11,-31.75 ; v1(18.651,-29.769) 21.424,-29.769 21.6,-29.945 21.6,-33.322 21.778,-33.5 33.05,-33.5 33.57,-32.98 33.57,-31.75 ; v1(18.651,-28.75) 21.881,-28.75 22.15,-29.019 22.15,-32.774 22.326,-32.95 30.83,-32.95 31.03,-32.75 31.03,-31.75 ; v1(18.651,-27.75) 24.75,-27.75 25.25,-27.25 28.574,-27.25 29.75,-28.426 29.75,-30.258 29.5,-30.508 28.962,-30.508 28.49,-30.98 28.49,-31.75 ; 23.41,-31.75 23.41,-30.926 23.828,-30.508 26.874,-30.508 27.25,-30.132 v1(27.25,-28.25)
  Bottom Layer w0.3: v1(12.35,-3.97) 12.35,-26 17.1,-30.75 v1(18.651,-30.75) ; 17.06,-1.43 15.95,-1.43 14.3,-3.08 14.29,-3.08 12.9,-4.47 12.9,-25.65 17.019,-29.769 v1(18.651,-29.769) ; v1(18.651,-28.75) 16.85,-28.75 13.45,-25.35 13.45,-5.02 15.84,-2.63 17.99,-2.63 18.26,-2.36 18.26,-1.75 18.58,-1.43 19.6,-1.43 ; v1(18.651,-27.75) 16.695,-27.75 14,-25.055 14,-6.27 15.1,-5.17 18.154,-5.17 18.4,-4.924 18.4,-3.473 19.123,-2.75 21.75,-2.75 22.14,-2.36 22.14,-1.43 ; 19.6,-3.97 19.6,-5.474 19.354,-5.72 15.38,-5.72 14.55,-6.55 14.55,-24.7 16.85,-27 18.862,-27 19.38,-27.518 19.38,-34.71 20.42,-35.75 35.86,-35.75 38.65,-32.96 38.65,-31.75 ; 25.95,-31.75 25.95,-30.75 25.68,-30.48 24.98,-30.48 24.75,-30.25 24.75,-26.5 24.5,-26.25 22.853,-26.25 20.253,-23.65 18.34,-23.65 17.85,-23.16 17.85,-9.554 18.304,-9.1 33.05,-9.1 33.5,-8.65 33.5,-1.93 34,-1.43 34.84,-1.43 ; v1(27.25,-28.25) v1(27.25,-26.5)

## Polygon pours and split planes (outlines as drawn)
GND on Bottom Layer "GND_L02_P-001" (solid, remove dead copper, pour order 0): -60,0 ccw(c0,0) 0,-60 ccw(c0,0) 60,0 ccw(c0,0) 0,60 ccw(c0,0)
+3.3 on Top Layer "VCC_L02_P-001" (solid, remove dead copper, pour order 1): -60,0 ccw(c0,0) 0,-60 ccw(c0,0) 60,0 ccw(c0,0) 0,60 ccw(c0,0)

## Silkscreen, mask and mechanical layers (free items; w line width, h text height)
Top Overlay:
  drawing of 119 lines, arcs and shapes, not listed
  text "Smart Grids" at -11.363,15.95 h2.2
  text "GND" at 45.901,-5.996 h1
  text "© Luka Kravos" at -5.841,-22.979 h2
  text "GND" at 19.744,-28.397 h1
Bottom Overlay:
  text "A" at 8.933,51.75 h1
  text "K" at 13.663,51.75 h1
  text "K" at -27.639,45.783 h1 r315
  text "A" at -30.983,42.438 h1 r315
  text "A" at 42.909,30.276 h1 r315
  text "K" at 46.254,26.932 h1 r315
  text "K" at -51.917,12.83 h1
  text "A" at -51.917,8.1 h1
  text "A" at 52.583,-9.1 h1
  text "K" at 52.583,-13.83 h1
  text "K" at -45.783,-27.639 h1 r45
  text "A" at -42.438,-30.983 h1 r45
  text "A" at 30.747,-43.616 h1 r315
  text "K" at 27.403,-46.961 h1 r315
  text "K" at -12.997,-52.75 h1
  text "A" at -8.267,-52.75 h1
Mechanical 1:
  drawing of 175 lines, arcs and shapes, not listed